# EAGLE board CT_schematic (EAGLE 7.6.0)

Size 100 x 80 mm. Coordinates in mm from the lower left corner, seen from the top.
Outline: 0,0 100,0 100,80 0,80 0,0
Copper layers (1*16): Top 0.035mm / dielectric 1.5mm / Bottom 0.035mm
Design rules "default": minimum track width 10mil, minimum drill 24mil, track to track 8mil, track to pad 8mil, pad to pad 8mil, via to via 8mil, smd to smd 8mil, copper to edge 40mil, drill to drill 8mil, minimum pad ring 10mil, minimum via ring 8mil, stop-mask expansion 4mil, vias tented up to drill 0mil, thermal gap 10mil

## Footprints (pad centres in the part's own frame; a part is rotated, then mirrored left to right if it is on the bottom)
C0603 = smd 0.8 x 0.8: 1 -0.762,0; 2 0.762,0
C0402 = smd 0.5 x 0.5: 1 -0.508,0; 2 0.508,0
C0805 = smd 1.2 x 1.3: 1 -1.016,0; 2 1.016,0
C1210 = smd 1.2 x 2.5: 1 -1.524,0; 2 1.524,0
EXV-9H = smd 3.505 x 1.676: 1 -2.857,0; 2 2.857,0
L0603 = smd 0.8 x 0.8: 1 -0.762,0; 2 0.762,0
L1210 = smd 1.2 x 2.5: 1 -1.524,0; 2 1.524,0
PJ-037B_PACKAGE = drill 3.7 square: 1 12,0 | drill 3.2 square: 2 6,0
R0603 = smd 0.8 x 0.8: 1 -0.762,0; 2 0.762,0
LQFP32 = smd 0.54 x 0.85: 1 -2.8,-4.275; 2 -2,-4.275; 3 -1.2,-4.275; 4 -0.4,-4.275; 5 0.4,-4.275; 6 1.19,-4.275; 7 1.99,-4.275; 8 2.79,-4.275; 17 2.8,4.275; 18 2,4.275; 19 1.2,4.275; 20 0.4,4.275; 21 -0.4,4.275; 22 -1.2,4.275; 23 -2,4.275; 24 -2.8,4.275 | smd 0.85 x 0.54: 9 4.275,-2.8; 10 4.275,-2; 11 4.275,-1.2; 12 4.275,-0.4; 13 4.275,0.4; 14 4.275,1.2; 15 4.275,2; 16 4.275,2.8; 25 -4.275,2.8; 26 -4.275,2; 27 -4.275,1.2; 28 -4.275,0.4; 29 -4.275,-0.4; 30 -4.275,-1.2; 31 -4.275,-2; 32 -4.275,-2.8
SAMTEC_FTSH-105-01-L-DV-K = smd 0.762 x 2.794: 1 -2.54,-2.032; 2 -2.54,2.032; 3 -1.27,-2.032; 4 -1.27,2.032; 5 0,-2.032; 6 0,2.032; 7 1.27,-2.032; 8 1.27,2.032; 9 2.54,-2.032; 10 2.54,2.032
SSOP-20 = smd 1.651 x 0.432: 1 -3.48,2.925; 2 -3.48,2.275; 3 -3.48,1.625; 4 -3.48,0.975; 5 -3.48,0.325; 6 -3.48,-0.325; 7 -3.48,-0.975; 8 -3.48,-1.625; 9 -3.48,-2.275; 10 -3.48,-2.925; 11 3.48,-2.925; 12 3.48,-2.275; 13 3.48,-1.625; 14 3.48,-0.975; 15 3.48,-0.325; 16 3.48,0.325; 17 3.48,0.975; 18 3.48,1.625; 19 3.48,2.275; 20 3.48,2.925
182-009-MALE = drill 1.194 pad 1.524 octagon: 1 -5.537,10.923; 2 -2.769,10.923; 3 0,10.923; 4 2.769,10.923; 5 5.537,10.923; 6 -4.153,8.08; 7 -1.384,8.08; 8 1.384,8.08; 9 4.153,8.08 | hole 3.048: -12.446,9.501; 12.446,9.501
ABLS-25.000MHZ-B2F-T = smd 5.6 x 2.8: 1 -3.81,0; 2 5.69,0
WSON-8 = smd 0.3 x 0.6: 1 -0.75,0; 2 0.05,0; 3 0.85,0; 4 1.65,0; 5 1.65,3.8; 6 0.85,3.8; 7 0.05,3.8; 8 -0.75,3.8 | smd 3 x 2.6: PAD 0.45,1.9
SON-6 = smd 0.55 x 0.3: 1 -0.355,0.5 | smd 0.52 x 0.3: 2 -0.37,0; 3 -0.37,-0.5; 4 0.37,-0.5; 5 0.37,0; 6 0.37,0.5
SW_4-1437565-2 = smd 1.4 x 2.1: 1 -2.23,4.55; 2 -2.23,-4.55; 3 2.23,4.55; 4 2.23,-4.55
LGM67K-G1J2-24-Z = smd 0.8 x 1.4: A -2,0; C 0,0
NC7SZ125M5X = smd 1.3 x 0.7: 1 -1.3,0.95; 2 -1.3,0; 3 -1.3,-0.95; 4 1.3,-0.95; 5 1.3,0.95
DUMMY_PACKAGE_115 = drill 0.3: 1 0,-1; 2 1.5,-1; 3 3,-1

## Placement (x,y rotation side)
C1  1e-07  [C0603]  -43.18,77.47 0 top  (outside the outline)
C2  1e-07  [C0603]  -46.99,77.47 0 top  (outside the outline)
C3  1e-07  [C0603]  -50.8,77.47 0 top  (outside the outline)
C4  1e-07  [C0603]  -54.61,77.47 0 top  (outside the outline)
C5  4.7e-06  [C0603]  -39.37,77.47 0 top  (outside the outline)
C6  1e-08  [C0603]  -58.42,77.47 0 top  (outside the outline)
C7  1e-06  [C0603]  -62.23,77.47 0 top  (outside the outline)
C8  1e-11  [C0402]  -45.72,82.55 0 top  (outside the outline)
C9  1e-11  [C0402]  -49.53,82.55 0 top  (outside the outline)
C10  1e-07  [C0402]  -53.34,82.55 0 top  (outside the outline)
C11  1e-06  [C0603]  -66.04,77.47 0 top  (outside the outline)
C12  1e-06  [C0603]  -69.85,77.47 0 top  (outside the outline)
C13  1e-06  [C0603]  -15.24,82.55 0 top  (outside the outline)
C14  4.7e-06  [C0805]  -21.59,71.12 0 top  (outside the outline)
C15  1e-08  [C0402]  -57.15,82.55 0 top  (outside the outline)
C16  1e-05  [C1210]  -49.53,64.77 0 top  (outside the outline)
C17  1e-05  [C1210]  -55.88,64.77 0 top  (outside the outline)
C18  1e-07  [C0402]  -60.96,82.55 0 top  (outside the outline)
C19  0.0001  [EXV-9H]  -38.1,55.88 0 top  (outside the outline)
C20  0.0001  [EXV-9H]  -49.53,55.88 0 top  (outside the outline)
C21  1e-08  [C0402]  -64.77,82.55 0 top  (outside the outline)
C22  1e-08  [C0402]  -68.58,82.55 0 top  (outside the outline)
F1  240.0  [L0603]  -19.05,82.55 0 top  (outside the outline)
I1  1.5e-05  [L1210]  -62.23,64.77 0 top  (outside the outline)
J1  PJ-037B  [PJ-037B_PACKAGE]  -27.94,44.45 0 top  (outside the outline)
R1  10000.0  [R0603]  -57.15,71.12 0 top  (outside the outline)
R2  1000.0  [R0603]  -22.86,82.55 0 top  (outside the outline)
R3  1270.0  [R0603]  -26.67,82.55 0 top  (outside the outline)
R4  4700.0  [R0603]  -30.48,82.55 0 top  (outside the outline)
R5  10000.0  [R0603]  -62.23,71.12 0 top  (outside the outline)
R6  10000.0  [R0603]  -67.31,71.12 0 top  (outside the outline)
R7  10000.0  [R0603]  -15.24,77.47 0 top  (outside the outline)
R8  10000.0  [R0603]  -20.32,77.47 0 top  (outside the outline)
R9  5.0  [R0603]  -34.29,82.55 0 top  (outside the outline)
R10  100000.0  [R0603]  -26.67,71.12 0 top  (outside the outline)
R11  100000.0  [R0603]  -31.75,71.12 0 top  (outside the outline)
R12  100000.0  [R0603]  -36.83,71.12 0 top  (outside the outline)
R13  100000.0  [R0603]  -41.91,71.12 0 top  (outside the outline)
R14  1500.0  [R0603]  -38.1,82.55 0 top  (outside the outline)
R15  1000.0  [R0603]  -41.91,82.55 0 top  (outside the outline)
R16  10000.0  [R0603]  -25.4,77.47 0 top  (outside the outline)
R17  10000.0  [R0603]  -30.48,77.47 0 top  (outside the outline)
R18  18000.0  [R0603]  -35.56,77.47 0 top  (outside the outline)
R19  470000.0  [R0603]  -46.99,71.12 0 top  (outside the outline)
R20  120000.0  [R0603]  -52.07,71.12 0 top  (outside the outline)
U1  STM32F334K4T6  [LQFP32]  -53.34,29.21 0 top  (outside the outline)
U2  FTSH-105-01-L-DV-K  [SAMTEC_FTSH-105-01-L-DV-K]  -35.56,30.48 0 top  (outside the outline)
U3  MAX3218EAP+T  [SSOP-20]  -54.61,41.91 0 top  (outside the outline)
U4  182-009-113R531  [182-009-MALE]  -36.83,6.35 0 top  (outside the outline)
U5  ABLS-25.000MHZ-B2F-T  [ABLS-25.000MHZ-B2F-T]  -26.67,64.77 0 top  (outside the outline)
U6  LP3878SDX-ADJ/NOPB  [WSON-8]  -30.48,54.61 0 top  (outside the outline)
U7  TPS3895ADRYR  [SON-6]  -20.32,86.36 0 top  (outside the outline)
U8  4-1437565-2  [SW_4-1437565-2]  -44.45,43.18 0 top  (outside the outline)
U9  Q65110A2395  [LGM67K-G1J2-24-Z]  -38.1,64.77 0 top  (outside the outline)
U10  nc7sz125m5x  [NC7SZ125M5X]  -67.31,63.5 0 top  (outside the outline)
U11  nc7sz125m5x  [NC7SZ125M5X]  -15.24,71.12 0 top  (outside the outline)
U12  Dummy  [DUMMY_PACKAGE_115]  -17.78,87.63 0 top  (outside the outline)

## Library data of the parts
C1-C22 F1 I1 J1 R1-R20 U1-U12 = circuit_tree

## Nets
CLK_CRYSTAL_U1_2: C8.1 U1.2 U5.1
CLK_CRYSTAL_U1_3: C9.1 U1.3 U5.2
GND: C1.2 C2.2 C3.2 C4.2 C5.2 C6.2 C7.2 C8.2 C9.2 C10.2 C11.2 C12.2 C13.2 C15.2 C16.2 C17.2 C18.2 C19.2 C20.2 C21.2 C22.2 J1.2 R2.2 R5.2 R9.2 R15.2 R18.2 R20.2 U1.16 U1.32 U2.3 U2.5 U3.5 U3.17 U3.20 U4.5 U6.3 U6.PAD U7.2 U9.C U10.2 U10.3 U11.1 U11.3 U12.1
NET_U1_4: R4.1 U1.4 U11.4
NET_U1_5: C6.1 C7.1 F1.1 U1.5
NET_U1_29: R3.1 U1.29 U9.A
NET_U1_30: R1.1 U1.30 U8.3 U8.4
NET_U1_31: R5.1 U1.31
NET_U2_9: R9.1 U2.9
NET_U3_1: I1.1 U3.1
NET_U3_2: R10.1 U3.2
NET_U3_3: R11.1 U3.3
NET_U3_4: R12.1 U3.4
NET_U3_15: C13.1 U3.15
NET_U3_16: C14.2 U3.16
NET_U3_18: C14.1 U3.18
NET_U3_19: C12.1 U3.19
NET_U4_2: U3.12 U4.2
NET_U4_3: U3.14 U4.3
NET_U4_7: U3.11 U4.7
NET_U4_8: U3.13 U4.8
NET_U6_1: C15.1 U6.1
NET_U6_6: R14.2 R15.1 U6.6
NET_U6_8: R13.1 U6.8
NET_U7_1: R17.1 R18.1 U7.1
NET_U7_3: R19.2 R20.1 U7.3
NET_U7_4: R16.1 U7.4 U10.4 U11.2
NET_U8_1: R2.1 U8.1 U8.2
PROC_ADC1_IN1: U1.6 U12.3
PROC_ADC1_IN2: U1.7 U12.2
PROC_SYS_JTCK_SWCLK: R7.1 U1.24 U2.4
PROC_SYS_JTDO_TRACESWO: U1.26 U2.6
PROC_SYS_JTMS_SWDIO: R8.1 U1.23 U2.2
PROC_USART1_CTS: U1.21 U3.8
PROC_USART1_RTS: U1.22 U3.10
PROC_USART1_RX: U1.20 U3.9
PROC_USART1_TX: U1.19 U3.7
RST_OUT_U2_JTAG_RST_B: R6.1 U2.10 U10.1
VCC_S1_14V8: C16.1 C19.1 C20.1 J1.1 R13.2 U6.4
VCC_TIER1_2V5: C1.1 C2.1 C3.1 C4.1 C5.1 C10.1 C11.1 C17.1 C18.1 C21.1 C22.1 F1.2 I1.2 R1.2 R3.2 R4.2 R6.2 R7.2 R8.2 R10.2 R11.2 R12.2 R14.1 R16.2 R17.2 R19.1 U1.1 U1.17 U2.1 U3.6 U6.5 U7.6 U10.5 U11.5

## Tracks (layer width: path | path; a pad name or v marks a point on that pad's centre or on a via)
CLK_CRYSTAL_U1_2  (2 unrouted)
CLK_CRYSTAL_U1_3  (2 unrouted)
GND  (44 unrouted)
NET_U1_4  (2 unrouted)
NET_U1_5  (3 unrouted)
NET_U1_29  (2 unrouted)
NET_U1_30  (3 unrouted)
NET_U1_31  (1 unrouted)
NET_U2_9  (1 unrouted)
NET_U3_1  (1 unrouted)
NET_U3_2  (1 unrouted)
NET_U3_3  (1 unrouted)
NET_U3_4  (1 unrouted)
NET_U3_15  (1 unrouted)
NET_U3_16  (1 unrouted)
NET_U3_18  (1 unrouted)
NET_U3_19  (1 unrouted)
NET_U4_2  (1 unrouted)
NET_U4_3  (1 unrouted)
NET_U4_7  (1 unrouted)
NET_U4_8  (1 unrouted)
NET_U6_1  (1 unrouted)
NET_U6_6  (2 unrouted)
NET_U6_8  (1 unrouted)
NET_U7_1  (2 unrouted)
NET_U7_3  (2 unrouted)
NET_U7_4  (3 unrouted)
NET_U8_1  (2 unrouted)
PROC_ADC1_IN1  (1 unrouted)
PROC_ADC1_IN2  (1 unrouted)
PROC_SYS_JTCK_SWCLK  (2 unrouted)
PROC_SYS_JTDO_TRACESWO  (1 unrouted)
PROC_SYS_JTMS_SWDIO  (2 unrouted)
PROC_USART1_CTS  (1 unrouted)
PROC_USART1_RTS  (1 unrouted)
PROC_USART1_RX  (1 unrouted)
PROC_USART1_TX  (1 unrouted)
RST_OUT_U2_JTAG_RST_B  (2 unrouted)
VCC_S1_14V8  (5 unrouted)
VCC_TIER1_2V5  (33 unrouted)